# EAGLE board Qwiic RFID - IDXXLA-Panel (EAGLE 9.1.0), part 1 of 2
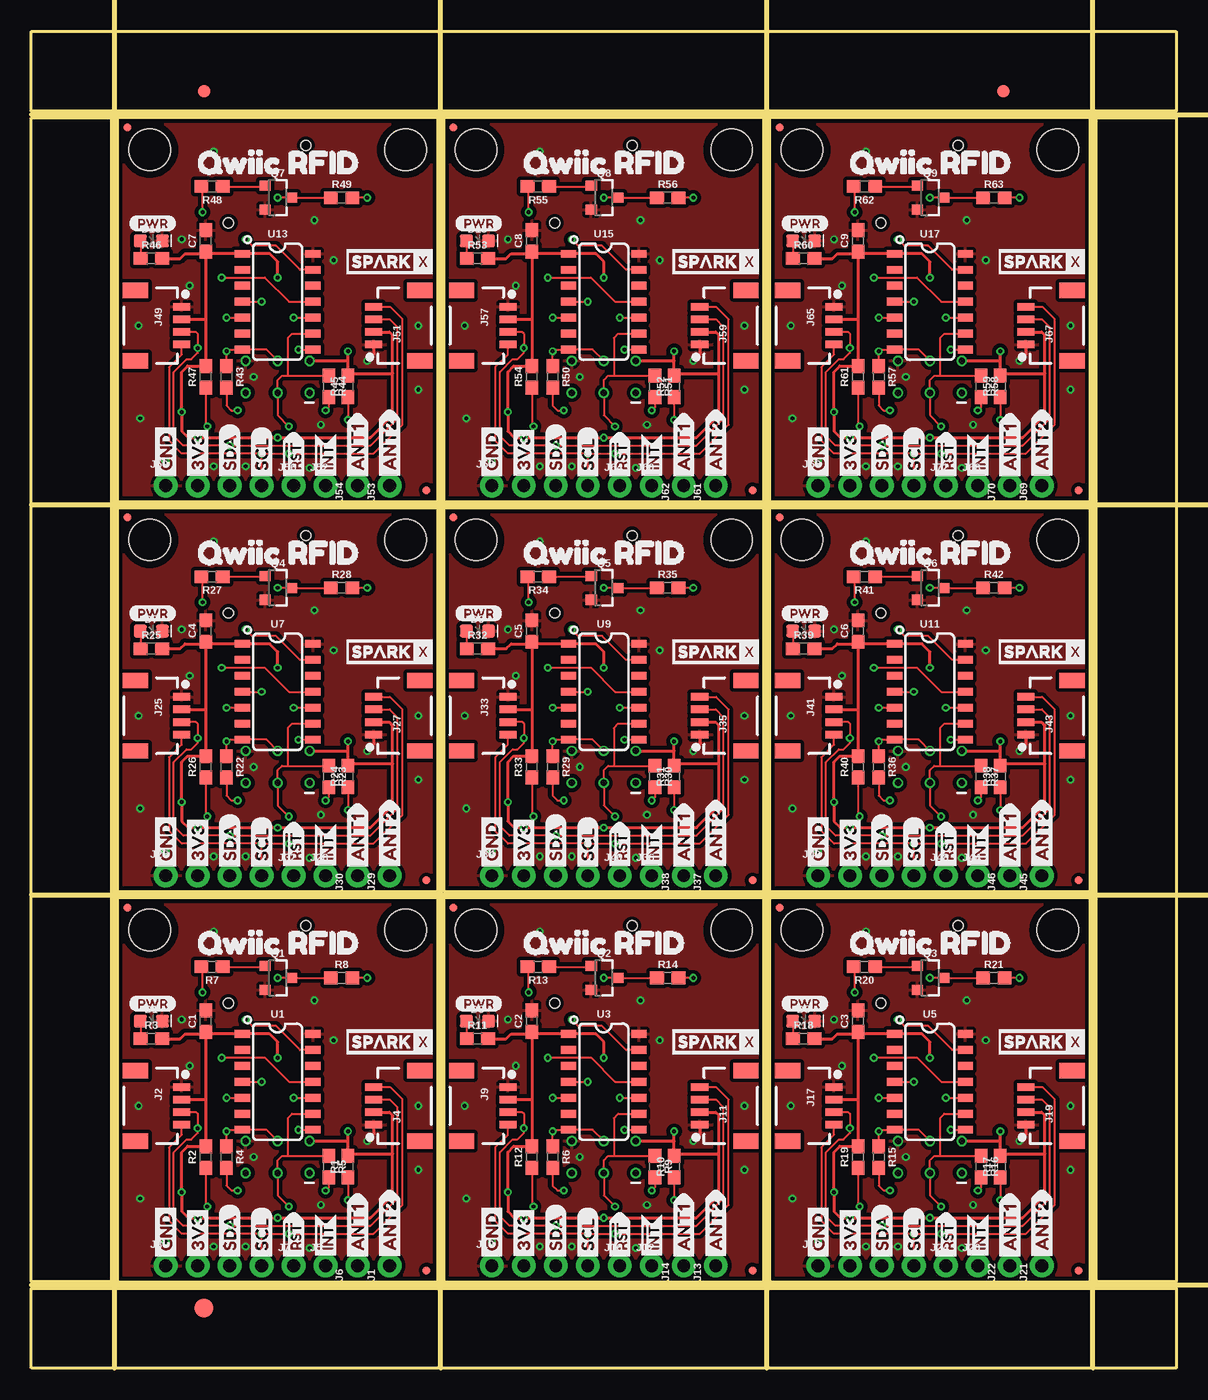
[diagram p0: board, top side]
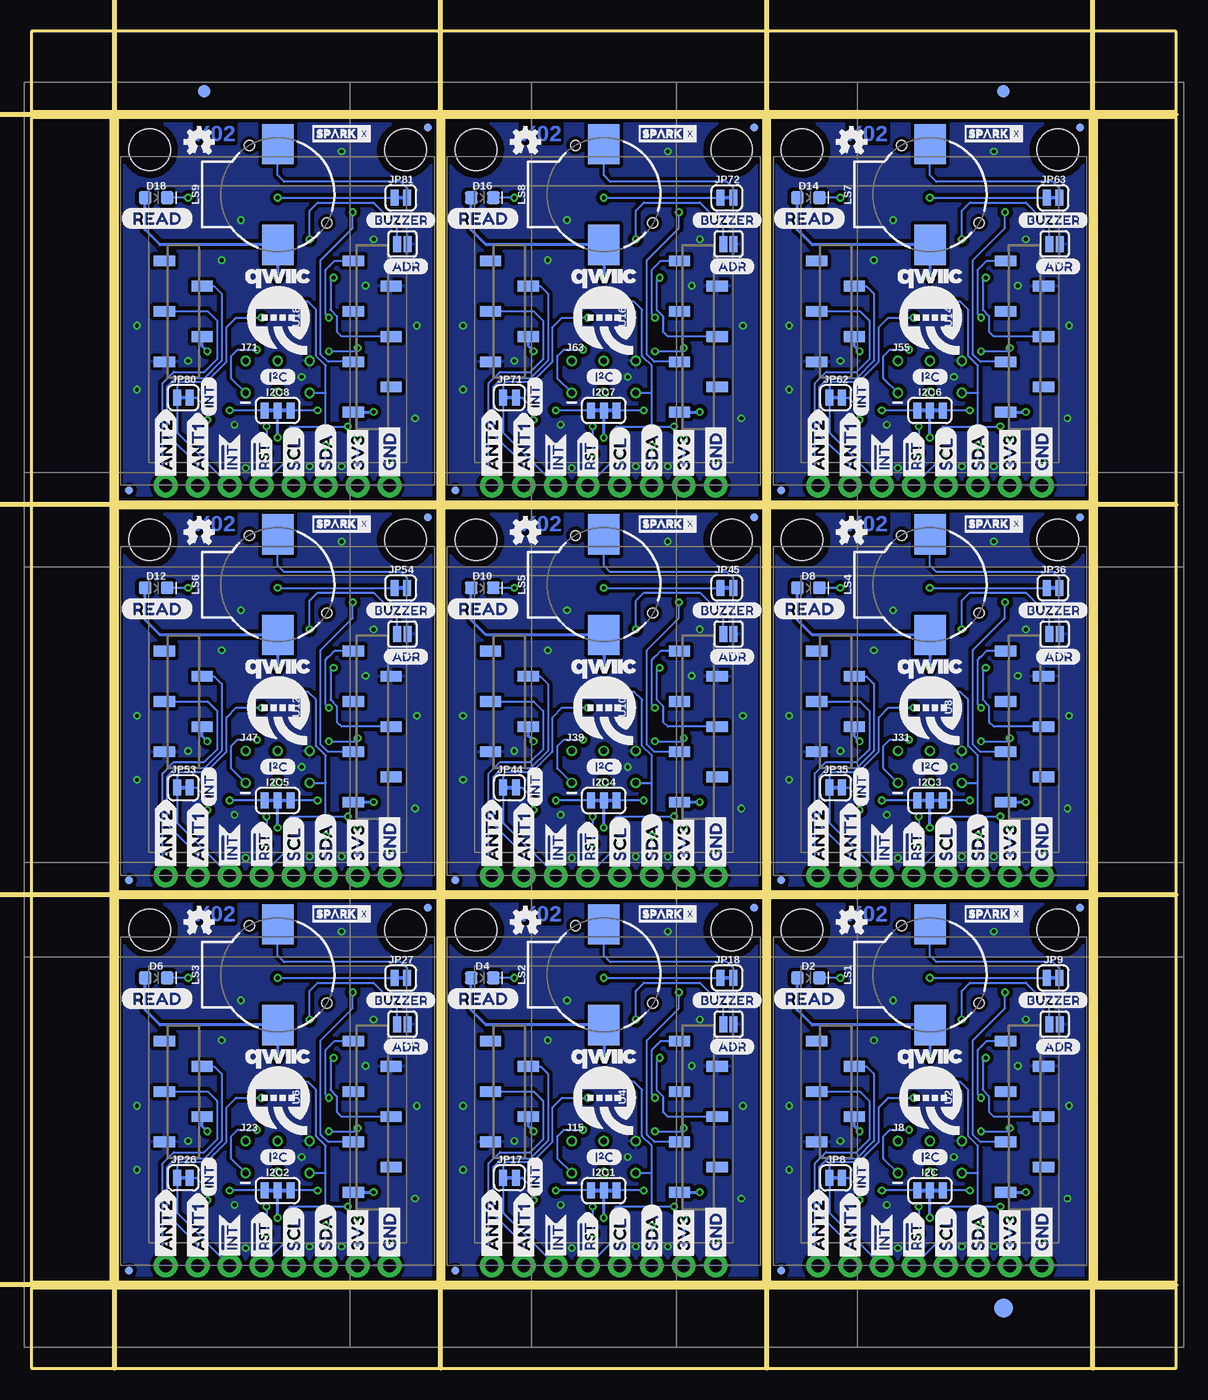
[diagram p1: board, bottom side, seen from below]

Size 90.93 x 106.17 mm. Coordinates in mm from the lower left corner, seen from the top.
Outline: 6.86,6.86 6.86,37.34 32.26,37.34 32.26,6.86 6.86,6.86
Outline: 32.77,6.86 32.77,37.34 58.17,37.34 58.17,6.86 32.77,6.86
Outline: 58.67,6.86 58.67,37.34 84.07,37.34 84.07,6.86 58.67,6.86
Outline: 6.86,37.85 6.86,68.33 32.26,68.33 32.26,37.85 6.86,37.85
Outline: 32.77,37.85 32.77,68.33 58.17,68.33 58.17,37.85 32.77,37.85
Outline: 58.67,37.85 58.67,68.33 84.07,68.33 84.07,37.85 58.67,37.85
Outline: 6.86,68.83 6.86,99.31 32.26,99.31 32.26,68.83 6.86,68.83
Outline: 32.77,68.83 32.77,99.31 58.17,99.31 58.17,68.83 32.77,68.83
Outline: 58.67,68.83 58.67,99.31 84.07,99.31 84.07,68.83 58.67,68.83
Outline: 0,6.35 90.93,6.35 90.93,0 0,0 0,6.35
Outline: 84.58,99.31 90.93,99.31 90.93,6.86 84.58,6.86 84.58,99.31
Outline: 0,106.17 90.93,106.17 90.93,99.82 0,99.82 0,106.17
Outline: 0,99.31 6.35,99.31 6.35,6.86 0,6.86 0,99.31
Copper layers (1*16): Top 0.035mm / dielectric 1.5mm / Bottom 0.035mm
Design rules "SparkFun-2-layer-PCBWay-LIMIT": minimum track width 6mil, minimum drill 0.3mm, track to track 6mil, track to pad 6mil, pad to pad 6mil, via to via 6mil, smd to smd 6mil, copper to edge 6mil, drill to drill 6mil, minimum pad ring 6mil, minimum via ring 6mil, stop-mask expansion 4mil, vias tented up to drill 25mil, thermal gap 10mil
Milling: 8 lines

## Footprints (pad centres in the part's own frame; a part is rotated, then mirrored left to right if it is on the bottom)
0603 = smd 1.1 x 1: 1 -0.85,0; 2 0.85,0
LED-0603 = smd 1 x 1: A -0.877,0; C 0.877,0
FIDUCIAL-1X2 = smd 1 x 1: 1 0,0
FIDUCIAL-1.5X3 = smd 1.5 x 1.5: 1 0,0
SMT-JUMPER_3_2-NC_TRACE_SILK = smd 0.635 x 1.27: 1 -1.016,0; 2 0,0; 3 1.016,0
1X01_NO_SILK = drill 1.016 pad 1.88: 1 0,0
1X04_1MM_RA = smd 0.6 x 1.35: 1 -1.5,0; 2 -0.5,0; 3 0.5,0; 4 1.5,0 | smd 1.2 x 2: NC1 2.8,-3.675; NC2 -2.8,-3.675
1X04_NO_SILK = drill 1.016 pad 1.88: 1 0,0; 2 2.54,0; 3 5.08,0; 4 7.62,0
2X3_TEST_POINTS = drill 0.508: 1 -2.54,-1.27; 2 -2.54,1.27; 3 0,-1.27; 4 0,1.27; 5 2.54,-1.27; 6 2.54,1.27
MICRO-FIDUCIAL = smd 0.635 x 0.635: 1 0,0
STAND-OFF = hole 3.302: 0,0
SMT-JUMPER_2_NO_SILK = smd 0.635 x 1.27: 1 -0.406,0; 2 0.406,0
SMT-JUMPER_2_NC_TRACE_SILK = smd 0.635 x 1.27: 1 -0.508,0; 2 0.508,0
BUZZER-CCV = smd 3.2 x 2.5: + 4,0; - -4,0 | hole 0.8: -3.9,-2.25; 2.25,3.9
SOT23-3 = smd 0.8 x 0.9: 1 -0.95,-1; 2 0.95,-1; 3 0,1.1
SO14 = smd 0.6 x 1.2: 1 -3.175,-2.8; 2 -1.905,-2.8; 3 -0.635,-2.8; 4 0.635,-2.8; 5 1.905,-2.8; 6 3.175,-2.8; 7 4.445,-2.8; 8 4.445,2.8; 9 3.175,2.8; 10 1.905,2.8; 11 0.635,2.8; 12 -0.635,2.8; 13 -1.905,2.8; 14 -3.175,2.8
ID-12_SMD = smd 0.85 x 1.7: 1 2.993,-8.998; 2 0.993,-5.998; 3 -1.007,-8.998; 4 -3.007,-5.998; 5 -5.007,-8.998; 6 -5.007,6.013; 7 -3.007,9.013; 8 -1.007,6.013; 9 0.993,9.013; 10 2.993,6.013; 11 6.993,6.013; NC 4.993,9.013

## Placement (x,y rotation side)
C1  0.1uF  [0603]  13.84,27.56 90 top
C2  0.1uF  [0603]  39.75,27.56 90 top
C3  0.1uF  [0603]  65.66,27.56 90 top
C4  0.1uF  [0603]  13.84,58.55 90 top
C5  0.1uF  [0603]  39.75,58.55 90 top
C6  0.1uF  [0603]  65.66,58.55 90 top
C7  0.1uF  [0603]  13.84,89.54 90 top
C8  0.1uF  [0603]  39.75,89.54 90 top
C9  0.1uF  [0603]  65.66,89.54 90 top
D1  RED  [LED-0603]  9.52,27.56 0 top
D2  BLUE  [LED-0603]  29.21,30.99 0 bottom
D3  RED  [LED-0603]  35.43,27.56 0 top
D4  BLUE  [LED-0603]  55.12,30.99 0 bottom
D5  RED  [LED-0603]  61.34,27.56 0 top
D6  BLUE  [LED-0603]  81.03,30.99 0 bottom
D7  RED  [LED-0603]  9.52,58.55 0 top
D8  BLUE  [LED-0603]  29.21,61.98 0 bottom
D9  RED  [LED-0603]  35.43,58.55 0 top
D10  BLUE  [LED-0603]  55.12,61.98 0 bottom
D11  RED  [LED-0603]  61.34,58.55 0 top
D12  BLUE  [LED-0603]  81.03,61.98 0 bottom
D13  RED  [LED-0603]  9.52,89.54 0 top
D14  BLUE  [LED-0603]  29.21,92.96 0 bottom
D15  RED  [LED-0603]  35.43,89.54 0 top
D16  BLUE  [LED-0603]  55.12,92.96 0 bottom
D17  RED  [LED-0603]  61.34,89.54 0 top
D18  BLUE  [LED-0603]  81.03,92.96 0 bottom
E$1  [FIDUCIAL-1X2]  13.72,101.41 0 top
E$2  [FIDUCIAL-1X2]  13.72,101.41 0 bottom
E$3  [FIDUCIAL-1X2]  77.22,101.41 0 top
E$4  [FIDUCIAL-1X2]  77.22,101.41 0 bottom
E$5  [FIDUCIAL-1.5X3]  13.72,4.76 0 top
E$6  [FIDUCIAL-1.5X3]  13.72,4.76 0 bottom
I2C  [SMT-JUMPER_3_2-NC_TRACE_SILK]  19.56,14.1 0 bottom
I2C1  [SMT-JUMPER_3_2-NC_TRACE_SILK]  45.47,14.1 0 bottom
I2C2  [SMT-JUMPER_3_2-NC_TRACE_SILK]  71.37,14.1 0 bottom
I2C3  [SMT-JUMPER_3_2-NC_TRACE_SILK]  19.56,45.08 0 bottom
I2C4  [SMT-JUMPER_3_2-NC_TRACE_SILK]  45.47,45.08 0 bottom
I2C5  [SMT-JUMPER_3_2-NC_TRACE_SILK]  71.37,45.08 0 bottom
I2C6  [SMT-JUMPER_3_2-NC_TRACE_SILK]  19.56,76.07 0 bottom
I2C7  [SMT-JUMPER_3_2-NC_TRACE_SILK]  45.47,76.07 0 bottom
I2C8  [SMT-JUMPER_3_2-NC_TRACE_SILK]  71.37,76.07 0 bottom
J1  [1X01_NO_SILK]  28.45,8.13 90 top
J2  SMD  [1X04_1MM_RA]  11.94,20.83 270 top
J3  PTH  [1X04_NO_SILK]  10.67,8.13 0 top
J4  SMD  [1X04_1MM_RA]  27.18,20.83 90 top
J5  [1X01_NO_SILK]  23.37,8.13 0 top
J6  [1X01_NO_SILK]  25.91,8.13 90 top
J7  [1X01_NO_SILK]  20.83,8.13 0 top
J8  AVR_SPI_PROG_3X2TESTPOINTS  [2X3_TEST_POINTS]  19.56,16.76 0 bottom
J9  SMD  [1X04_1MM_RA]  37.85,20.83 270 top
J10  PTH  [1X04_NO_SILK]  36.58,8.13 0 top
J11  SMD  [1X04_1MM_RA]  53.09,20.83 90 top
J12  [1X01_NO_SILK]  49.28,8.13 0 top
J13  [1X01_NO_SILK]  54.36,8.13 90 top
J14  [1X01_NO_SILK]  51.82,8.13 90 top
J15  AVR_SPI_PROG_3X2TESTPOINTS  [2X3_TEST_POINTS]  45.47,16.76 0 bottom
J16  [1X01_NO_SILK]  46.74,8.13 0 top
J17  SMD  [1X04_1MM_RA]  63.75,20.83 270 top
J18  PTH  [1X04_NO_SILK]  62.48,8.13 0 top
J19  SMD  [1X04_1MM_RA]  78.99,20.83 90 top
J20  [1X01_NO_SILK]  75.18,8.13 0 top
J21  [1X01_NO_SILK]  80.26,8.13 90 top
J22  [1X01_NO_SILK]  77.72,8.13 90 top
J23  AVR_SPI_PROG_3X2TESTPOINTS  [2X3_TEST_POINTS]  71.37,16.76 0 bottom
J24  [1X01_NO_SILK]  72.64,8.13 0 top
J25  SMD  [1X04_1MM_RA]  11.94,51.82 270 top
J26  PTH  [1X04_NO_SILK]  10.67,39.12 0 top
J27  SMD  [1X04_1MM_RA]  27.18,51.82 90 top
J28  [1X01_NO_SILK]  23.37,39.12 0 top
J29  [1X01_NO_SILK]  28.45,39.12 90 top
J30  [1X01_NO_SILK]  25.91,39.12 90 top
J31  AVR_SPI_PROG_3X2TESTPOINTS  [2X3_TEST_POINTS]  19.56,47.75 0 bottom
J32  [1X01_NO_SILK]  20.83,39.12 0 top
J33  SMD  [1X04_1MM_RA]  37.85,51.82 270 top
J34  PTH  [1X04_NO_SILK]  36.58,39.12 0 top
J35  SMD  [1X04_1MM_RA]  53.09,51.82 90 top
J36  [1X01_NO_SILK]  49.28,39.12 0 top
J37  [1X01_NO_SILK]  54.36,39.12 90 top
J38  [1X01_NO_SILK]  51.82,39.12 90 top
J39  AVR_SPI_PROG_3X2TESTPOINTS  [2X3_TEST_POINTS]  45.47,47.75 0 bottom
J40  [1X01_NO_SILK]  46.74,39.12 0 top
J41  SMD  [1X04_1MM_RA]  63.75,51.82 270 top
J42  PTH  [1X04_NO_SILK]  62.48,39.12 0 top
J43  SMD  [1X04_1MM_RA]  78.99,51.82 90 top
J44  [1X01_NO_SILK]  75.18,39.12 0 top
J45  [1X01_NO_SILK]  80.26,39.12 90 top
J46  [1X01_NO_SILK]  77.72,39.12 90 top
J47  AVR_SPI_PROG_3X2TESTPOINTS  [2X3_TEST_POINTS]  71.37,47.75 0 bottom
J48  [1X01_NO_SILK]  72.64,39.12 0 top
J49  SMD  [1X04_1MM_RA]  11.94,82.8 270 top
J50  PTH  [1X04_NO_SILK]  10.67,70.1 0 top
J51  SMD  [1X04_1MM_RA]  27.18,82.8 90 top
J52  [1X01_NO_SILK]  23.37,70.1 0 top
J53  [1X01_NO_SILK]  28.45,70.1 90 top
J54  [1X01_NO_SILK]  25.91,70.1 90 top
J55  AVR_SPI_PROG_3X2TESTPOINTS  [2X3_TEST_POINTS]  19.56,78.74 0 bottom
J56  [1X01_NO_SILK]  20.83,70.1 0 top
J57  SMD  [1X04_1MM_RA]  37.85,82.8 270 top
J58  PTH  [1X04_NO_SILK]  36.58,70.1 0 top
J59  SMD  [1X04_1MM_RA]  53.09,82.8 90 top
J60  [1X01_NO_SILK]  49.28,70.1 0 top
J61  [1X01_NO_SILK]  54.36,70.1 90 top
J62  [1X01_NO_SILK]  51.82,70.1 90 top
J63  AVR_SPI_PROG_3X2TESTPOINTS  [2X3_TEST_POINTS]  45.47,78.74 0 bottom
J64  [1X01_NO_SILK]  46.74,70.1 0 top
J65  SMD  [1X04_1MM_RA]  63.75,82.8 270 top
J66  PTH  [1X04_NO_SILK]  62.48,70.1 0 top
J67  SMD  [1X04_1MM_RA]  78.99,82.8 90 top
J68  [1X01_NO_SILK]  75.18,70.1 0 top
J69  [1X01_NO_SILK]  80.26,70.1 90 top
J70  [1X01_NO_SILK]  77.72,70.1 90 top
J71  AVR_SPI_PROG_3X2TESTPOINTS  [2X3_TEST_POINTS]  71.37,78.74 0 bottom
J72  [1X01_NO_SILK]  72.64,70.1 0 top
JP1  FIDUCIALUFIDUCIAL  [MICRO-FIDUCIAL]  7.62,36.58 0 bottom
JP2  FIDUCIALUFIDUCIAL  [MICRO-FIDUCIAL]  31.37,7.75 0 top
JP3  STAND-OFF  [STAND-OFF]  9.4,34.8 0 top
JP4  STAND-OFF  [STAND-OFF]  29.72,34.8 0 top
JP5  FIDUCIALUFIDUCIAL  [MICRO-FIDUCIAL]  31.37,7.75 0 bottom
JP6  FIDUCIALUFIDUCIAL  [MICRO-FIDUCIAL]  7.62,36.58 0 top
JP7  ADR  [SMT-JUMPER_2_NO_SILK]  9.65,27.3 180 bottom
JP8  INT  [SMT-JUMPER_2_NC_TRACE_SILK]  27.05,15.11 0 bottom
JP9  BUZZ  [SMT-JUMPER_2_NC_TRACE_SILK]  9.78,30.99 0 bottom
JP10  STAND-OFF  [STAND-OFF]  35.31,34.8 0 top
JP11  STAND-OFF  [STAND-OFF]  55.63,34.8 0 top
JP12  FIDUCIALUFIDUCIAL  [MICRO-FIDUCIAL]  57.28,7.75 0 top
JP13  FIDUCIALUFIDUCIAL  [MICRO-FIDUCIAL]  33.53,36.58 0 top
JP14  FIDUCIALUFIDUCIAL  [MICRO-FIDUCIAL]  33.53,36.58 0 bottom
JP15  FIDUCIALUFIDUCIAL  [MICRO-FIDUCIAL]  57.28,7.75 0 bottom
JP16  ADR  [SMT-JUMPER_2_NO_SILK]  35.56,27.3 180 bottom
JP17  INT  [SMT-JUMPER_2_NC_TRACE_SILK]  52.96,15.11 0 bottom
JP18  BUZZ  [SMT-JUMPER_2_NC_TRACE_SILK]  35.69,30.99 0 bottom
JP19  STAND-OFF  [STAND-OFF]  61.21,34.8 0 top
JP20  STAND-OFF  [STAND-OFF]  81.53,34.8 0 top
JP21  FIDUCIALUFIDUCIAL  [MICRO-FIDUCIAL]  83.19,7.75 0 top
JP22  FIDUCIALUFIDUCIAL  [MICRO-FIDUCIAL]  59.44,36.58 0 top
JP23  FIDUCIALUFIDUCIAL  [MICRO-FIDUCIAL]  59.44,36.58 0 bottom
JP24  FIDUCIALUFIDUCIAL  [MICRO-FIDUCIAL]  83.19,7.75 0 bottom
JP25  ADR  [SMT-JUMPER_2_NO_SILK]  61.47,27.3 180 bottom
JP26  INT  [SMT-JUMPER_2_NC_TRACE_SILK]  78.87,15.11 0 bottom
JP27  BUZZ  [SMT-JUMPER_2_NC_TRACE_SILK]  61.59,30.99 0 bottom
JP28  STAND-OFF  [STAND-OFF]  9.4,65.79 0 top
JP29  STAND-OFF  [STAND-OFF]  29.72,65.79 0 top
JP30  FIDUCIALUFIDUCIAL  [MICRO-FIDUCIAL]  31.37,38.73 0 top
JP31  FIDUCIALUFIDUCIAL  [MICRO-FIDUCIAL]  7.62,67.56 0 top
JP32  FIDUCIALUFIDUCIAL  [MICRO-FIDUCIAL]  7.62,67.56 0 bottom
JP33  FIDUCIALUFIDUCIAL  [MICRO-FIDUCIAL]  31.37,38.73 0 bottom
JP34  ADR  [SMT-JUMPER_2_NO_SILK]  9.65,58.29 180 bottom
JP35  INT  [SMT-JUMPER_2_NC_TRACE_SILK]  27.05,46.1 0 bottom
JP36  BUZZ  [SMT-JUMPER_2_NC_TRACE_SILK]  9.78,61.98 0 bottom
JP37  STAND-OFF  [STAND-OFF]  35.31,65.79 0 top
JP38  STAND-OFF  [STAND-OFF]  55.63,65.79 0 top
JP39  FIDUCIALUFIDUCIAL  [MICRO-FIDUCIAL]  57.28,38.73 0 top
JP40  FIDUCIALUFIDUCIAL  [MICRO-FIDUCIAL]  33.53,67.56 0 top
JP41  FIDUCIALUFIDUCIAL  [MICRO-FIDUCIAL]  33.53,67.56 0 bottom
JP42  FIDUCIALUFIDUCIAL  [MICRO-FIDUCIAL]  57.28,38.73 0 bottom
JP43  ADR  [SMT-JUMPER_2_NO_SILK]  35.56,58.29 180 bottom
JP44  INT  [SMT-JUMPER_2_NC_TRACE_SILK]  52.96,46.1 0 bottom
JP45  BUZZ  [SMT-JUMPER_2_NC_TRACE_SILK]  35.69,61.98 0 bottom
JP46  STAND-OFF  [STAND-OFF]  61.21,65.79 0 top
JP47  STAND-OFF  [STAND-OFF]  81.53,65.79 0 top
JP48  FIDUCIALUFIDUCIAL  [MICRO-FIDUCIAL]  83.19,38.73 0 top
JP49  FIDUCIALUFIDUCIAL  [MICRO-FIDUCIAL]  59.44,67.56 0 top
JP50  FIDUCIALUFIDUCIAL  [MICRO-FIDUCIAL]  59.44,67.56 0 bottom
JP51  FIDUCIALUFIDUCIAL  [MICRO-FIDUCIAL]  83.19,38.73 0 bottom
JP52  ADR  [SMT-JUMPER_2_NO_SILK]  61.47,58.29 180 bottom
JP53  INT  [SMT-JUMPER_2_NC_TRACE_SILK]  78.87,46.1 0 bottom
JP54  BUZZ  [SMT-JUMPER_2_NC_TRACE_SILK]  61.59,61.98 0 bottom
JP55  STAND-OFF  [STAND-OFF]  9.4,96.77 0 top
JP56  STAND-OFF  [STAND-OFF]  29.72,96.77 0 top
JP57  FIDUCIALUFIDUCIAL  [MICRO-FIDUCIAL]  31.37,69.72 0 top
JP58  FIDUCIALUFIDUCIAL  [MICRO-FIDUCIAL]  7.62,98.55 0 top
JP59  FIDUCIALUFIDUCIAL  [MICRO-FIDUCIAL]  7.62,98.55 0 bottom
JP60  FIDUCIALUFIDUCIAL  [MICRO-FIDUCIAL]  31.37,69.72 0 bottom
JP61  ADR  [SMT-JUMPER_2_NO_SILK]  9.65,89.28 180 bottom
JP62  INT  [SMT-JUMPER_2_NC_TRACE_SILK]  27.05,77.09 0 bottom
JP63  BUZZ  [SMT-JUMPER_2_NC_TRACE_SILK]  9.78,92.96 0 bottom
JP64  STAND-OFF  [STAND-OFF]  35.31,96.77 0 top
JP65  STAND-OFF  [STAND-OFF]  55.63,96.77 0 top
JP66  FIDUCIALUFIDUCIAL  [MICRO-FIDUCIAL]  57.28,69.72 0 top
JP67  FIDUCIALUFIDUCIAL  [MICRO-FIDUCIAL]  33.53,98.55 0 top
JP68  FIDUCIALUFIDUCIAL  [MICRO-FIDUCIAL]  33.53,98.55 0 bottom
JP69  FIDUCIALUFIDUCIAL  [MICRO-FIDUCIAL]  57.28,69.72 0 bottom
JP70  ADR  [SMT-JUMPER_2_NO_SILK]  35.56,89.28 180 bottom
JP71  INT  [SMT-JUMPER_2_NC_TRACE_SILK]  52.96,77.09 0 bottom
JP72  BUZZ  [SMT-JUMPER_2_NC_TRACE_SILK]  35.69,92.96 0 bottom
JP73  STAND-OFF  [STAND-OFF]  61.21,96.77 0 top
JP74  STAND-OFF  [STAND-OFF]  81.53,96.77 0 top
JP75  FIDUCIALUFIDUCIAL  [MICRO-FIDUCIAL]  83.19,69.72 0 top
JP76  FIDUCIALUFIDUCIAL  [MICRO-FIDUCIAL]  59.44,98.55 0 top
JP77  FIDUCIALUFIDUCIAL  [MICRO-FIDUCIAL]  59.44,98.55 0 bottom
JP78  FIDUCIALUFIDUCIAL  [MICRO-FIDUCIAL]  83.19,69.72 0 bottom
JP79  ADR  [SMT-JUMPER_2_NO_SILK]  61.47,89.28 180 bottom
JP80  INT  [SMT-JUMPER_2_NC_TRACE_SILK]  78.87,77.09 0 bottom
JP81  BUZZ  [SMT-JUMPER_2_NC_TRACE_SILK]  61.59,92.96 0 bottom
LOGO1  OSHW-LOGOMINI  [OSHW-LOGO-MINI]  25.78,35.43 0 bottom
LOGO2  OSHW-LOGOMINI  [OSHW-LOGO-MINI]  51.69,35.43 0 bottom
LOGO3  OSHW-LOGOMINI  [OSHW-LOGO-MINI]  77.6,35.43 0 bottom
LOGO4  OSHW-LOGOMINI  [OSHW-LOGO-MINI]  25.78,66.42 0 bottom
LOGO5  OSHW-LOGOMINI  [OSHW-LOGO-MINI]  51.69,66.42 0 bottom
LOGO6  OSHW-LOGOMINI  [OSHW-LOGO-MINI]  77.6,66.42 0 bottom
LOGO7  OSHW-LOGOMINI  [OSHW-LOGO-MINI]  25.78,97.41 0 bottom
LOGO8  OSHW-LOGOMINI  [OSHW-LOGO-MINI]  51.69,97.41 0 bottom
LOGO9  OSHW-LOGOMINI  [OSHW-LOGO-MINI]  77.6,97.41 0 bottom
LS1  BUZZER-SMD  [BUZZER-CCV]  19.56,31.24 270 bottom
LS2  BUZZER-SMD  [BUZZER-CCV]  45.47,31.24 270 bottom
LS3  BUZZER-SMD  [BUZZER-CCV]  71.37,31.24 270 bottom
LS4  BUZZER-SMD  [BUZZER-CCV]  19.56,62.23 270 bottom
LS5  BUZZER-SMD  [BUZZER-CCV]  45.47,62.23 270 bottom
LS6  BUZZER-SMD  [BUZZER-CCV]  71.37,62.23 270 bottom
LS7  BUZZER-SMD  [BUZZER-CCV]  19.56,93.22 270 bottom
LS8  BUZZER-SMD  [BUZZER-CCV]  45.47,93.22 270 bottom
LS9  BUZZER-SMD  [BUZZER-CCV]  71.37,93.22 270 bottom
Q1  600mA/40V  [SOT23-3]  19.56,30.99 270 top
Q2  600mA/40V  [SOT23-3]  45.47,30.99 270 top
Q3  600mA/40V  [SOT23-3]  71.37,30.99 270 top
Q4  600mA/40V  [SOT23-3]  19.56,61.98 270 top
Q5  600mA/40V  [SOT23-3]  45.47,61.98 270 top
Q6  600mA/40V  [SOT23-3]  71.37,61.98 270 top
Q7  600mA/40V  [SOT23-3]  19.56,92.96 270 top
Q8  600mA/40V  [SOT23-3]  45.47,92.96 270 top
Q9  600mA/40V  [SOT23-3]  71.37,92.96 270 top
R1  10k  [0603]  25.15,16 90 top
R2  10k  [0603]  13.84,16.76 90 top
R3  1k  [0603]  9.52,26.16 0 top
R4  2.2k  [0603]  15.49,16.76 270 top
R5  2.2k  [0603]  23.62,16 270 top
R6  2.2k  [0603]  41.4,16.76 270 top
R7  1k  [0603]  14.35,31.88 180 top
R8  1k  [0603]  24.64,30.99 0 top
R9  2.2k  [0603]  49.53,16 270 top
R10  10k  [0603]  51.05,16 90 top
R11  1k  [0603]  35.43,26.16 0 top
R12  10k  [0603]  39.75,16.76 90 top
R13  1k  [0603]  40.26,31.88 180 top
R14  1k  [0603]  50.55,30.99 0 top
R15  2.2k  [0603]  67.31,16.76 270 top
R16  2.2k  [0603]  75.44,16 270 top
R17  10k  [0603]  76.96,16 90 top
R18  1k  [0603]  61.34,26.16 0 top
R19  10k  [0603]  65.66,16.76 90 top
R20  1k  [0603]  66.17,31.88 180 top
R21  1k  [0603]  76.45,30.99 0 top
R22  2.2k  [0603]  15.49,47.75 270 top
R23  2.2k  [0603]  23.62,46.99 270 top
R24  10k  [0603]  25.15,46.99 90 top
R25  1k  [0603]  9.52,57.15 0 top
R26  10k  [0603]  13.84,47.75 90 top
R27  1k  [0603]  14.35,62.86 180 top
R28  1k  [0603]  24.64,61.98 0 top
R29  2.2k  [0603]  41.4,47.75 270 top
R30  2.2k  [0603]  49.53,46.99 270 top
R31  10k  [0603]  51.05,46.99 90 top
R32  1k  [0603]  35.43,57.15 0 top
R33  10k  [0603]  39.75,47.75 90 top
R34  1k  [0603]  40.26,62.86 180 top
R35  1k  [0603]  50.55,61.98 0 top
R36  2.2k  [0603]  67.31,47.75 270 top
R37  2.2k  [0603]  75.44,46.99 270 top
R38  10k  [0603]  76.96,46.99 90 top
R39  1k  [0603]  61.34,57.15 0 top
R40  10k  [0603]  65.66,47.75 90 top
R41  1k  [0603]  66.17,62.86 180 top
R42  1k  [0603]  76.45,61.98 0 top
R43  2.2k  [0603]  15.49,78.74 270 top
R44  2.2k  [0603]  23.62,77.98 270 top
R45  10k  [0603]  25.15,77.98 90 top
R46  1k  [0603]  9.52,88.14 0 top
R47  10k  [0603]  13.84,78.74 90 top
R48  1k  [0603]  14.35,93.85 180 top
R49  1k  [0603]  24.64,92.96 0 top
R50  2.2k  [0603]  41.4,78.74 270 top
R51  2.2k  [0603]  49.53,77.98 270 top
R52  10k  [0603]  51.05,77.98 90 top
R53  1k  [0603]  35.43,88.14 0 top
R54  10k  [0603]  39.75,78.74 90 top
R55  1k  [0603]  40.26,93.85 180 top
R56  1k  [0603]  50.55,92.96 0 top
R57  2.2k  [0603]  67.31,78.74 270 top
R58  2.2k  [0603]  75.44,77.98 270 top
R59  10k  [0603]  76.96,77.98 90 top
R60  1k  [0603]  61.34,88.14 0 top
R61  10k  [0603]  65.66,78.74 90 top
R62  1k  [0603]  66.17,93.85 180 top
R63  1k  [0603]  76.45,92.96 0 top
U1  ATTINY84-ARDUINO  [SO14]  19.56,23.37 270 top
U2  ID-12/20SMD  [ID-12_SMD]  19.56,20.95 270 bottom
U3  ATTINY84-ARDUINO  [SO14]  45.47,23.37 270 top
U4  ID-12/20SMD  [ID-12_SMD]  45.47,20.95 270 bottom
U5  ATTINY84-ARDUINO  [SO14]  71.37,23.37 270 top
U6  ID-12/20SMD  [ID-12_SMD]  71.37,20.95 270 bottom
U7  ATTINY84-ARDUINO  [SO14]  19.56,54.36 270 top
U8  ID-12/20SMD  [ID-12_SMD]  19.56,51.94 270 bottom
U9  ATTINY84-ARDUINO  [SO14]  45.47,54.36 270 top
U10  ID-12/20SMD  [ID-12_SMD]  45.47,51.94 270 bottom
U11  ATTINY84-ARDUINO  [SO14]  71.37,54.36 270 top
U12  ID-12/20SMD  [ID-12_SMD]  71.37,51.94 270 bottom
U13  ATTINY84-ARDUINO  [SO14]  19.56,85.34 270 top
U14  ID-12/20SMD  [ID-12_SMD]  19.56,82.93 270 bottom
U15  ATTINY84-ARDUINO  [SO14]  45.47,85.34 270 top
U16  ID-12/20SMD  [ID-12_SMD]  45.47,82.93 270 bottom
U17  ATTINY84-ARDUINO  [SO14]  71.37,85.34 270 top
U18  ID-12/20SMD  [ID-12_SMD]  71.37,82.93 270 bottom
U$1  [SPARKX-TINY]  14.48,36.07 0 bottom
U$2  [I_SUPER2_C-()-03]  20.95,16.76 0 bottom
U$3  [ANT20]  28.45,8.38 90 bottom
U$4  SPARKX-LOGO3  [SPARKX-SMALL]  28.45,25.91 0 top
U$5  [RST#-[>]  20.83,8.25 90 top
U$6  [SDA-[)]  15.75,8.38 90 top
U$7  [SCL-[)]  18.29,8.38 90 top
U$8  [QWIIC-LOGO-MEDIUM]  19.56,21.97 0 bottom
U$9  [GND-04]  10.67,8.38 90 top
U$10  [3V3-04]  13.21,8.38 90 top
U$11  [INT#-[<]  23.37,8.25 90 top
U$12  [ADR0]  11.18,25.53 0 bottom
U$13  [INT0]  25.02,13.59 90 bottom
U$14  [PWR-()-03]  7.75,28.96 0 top
U$15  [BUZZER0]  12.57,29.21 0 bottom
U$16  [ANT10]  25.91,8.38 90 top
U$17  [ANT20]  28.45,8.38 90 top
U$18  [READ0]  32,29.34 0 bottom
U$19  [QWIIC_RFID0]  11.56,33.78 0 top
U$20  [ANT10]  25.91,8.38 90 bottom
U$21  [INT#-[<]  23.37,8.25 90 bottom
U$22  [SCL-[)]  18.29,8.38 90 bottom
U$23  [SDA-[)]  15.75,8.38 90 bottom
U$24  [3V3-04]  13.21,8.38 90 bottom
U$25  [GND-04]  10.67,8.38 90 bottom
U$26  [RST#-[>]  20.83,8.25 90 bottom
U$27  [QWIIC-LOGO-MEDIUM]  45.47,21.97 0 bottom
U$28  SPARKX-LOGO3  [SPARKX-SMALL]  54.36,25.91 0 top
U$29  [RST#-[>]  46.74,8.25 90 top
U$30  [SDA-[)]  41.66,8.38 90 top
U$31  [SCL-[)]  44.2,8.38 90 top
U$32  [GND-04]  36.58,8.38 90 top
U$33  [3V3-04]  39.12,8.38 90 top
U$34  [INT#-[<]  49.28,8.25 90 top
U$35  [BUZZER0]  38.48,29.21 0 bottom
U$36  [ANT10]  51.82,8.38 90 top
U$37  [ANT20]  54.36,8.38 90 top
U$38  [READ0]  57.91,29.34 0 bottom
U$39  [QWIIC_RFID0]  37.46,33.78 0 top
U$40  [ANT20]  54.36,8.38 90 bottom
U$41  [ANT10]  51.82,8.38 90 bottom
U$42  [INT#-[<]  49.28,8.25 90 bottom
U$43  [SCL-[)]  44.2,8.38 90 bottom
U$44  [SDA-[)]  41.66,8.38 90 bottom
U$45  [3V3-04]  39.12,8.38 90 bottom
U$46  [GND-04]  36.58,8.38 90 bottom
U$47  [RST#-[>]  46.74,8.25 90 bottom
U$48  [I_SUPER2_C-()-03]  46.86,16.76 0 bottom
U$49  [ADR0]  37.08,25.53 0 bottom
U$50  [INT0]  50.93,13.59 90 bottom
U$51  [PWR-()-03]  33.66,28.96 0 top
U$52  [SPARKX-TINY]  40.39,36.07 0 bottom
U$53  [QWIIC-LOGO-MEDIUM]  71.37,21.97 0 bottom
U$54  SPARKX-LOGO3  [SPARKX-SMALL]  80.26,25.91 0 top
U$55  [RST#-[>]  72.64,8.25 90 top
U$56  [SDA-[)]  67.56,8.38 90 top
U$57  [SCL-[)]  70.1,8.38 90 top
U$58  [GND-04]  62.48,8.38 90 top
U$59  [3V3-04]  65.02,8.38 90 top
U$60  [INT#-[<]  75.18,8.25 90 top
U$61  [BUZZER0]  64.39,29.21 0 bottom
U$62  [ANT10]  77.72,8.38 90 top
U$63  [ANT20]  80.26,8.38 90 top
U$64  [READ0]  83.82,29.34 0 bottom
U$65  [QWIIC_RFID0]  63.37,33.78 0 top
U$66  [ANT20]  80.26,8.38 90 bottom
U$67  [ANT10]  77.72,8.38 90 bottom
U$68  [INT#-[<]  75.18,8.25 90 bottom
U$69  [SCL-[)]  70.1,8.38 90 bottom
U$70  [SDA-[)]  67.56,8.38 90 bottom
U$71  [3V3-04]  65.02,8.38 90 bottom
U$72  [GND-04]  62.48,8.38 90 bottom
U$73  [RST#-[>]  72.64,8.25 90 bottom
U$74  [I_SUPER2_C-()-03]  72.77,16.76 0 bottom
U$75  [ADR0]  62.99,25.53 0 bottom
U$76  [INT0]  76.84,13.59 90 bottom
U$77  [PWR-()-03]  59.56,28.96 0 top
U$78  [SPARKX-TINY]  66.29,36.07 0 bottom
U$79  [QWIIC-LOGO-MEDIUM]  19.56,52.96 0 bottom
U$80  SPARKX-LOGO3  [SPARKX-SMALL]  28.45,56.9 0 top
U$81  [RST#-[>]  20.83,39.24 90 top
U$82  [SDA-[)]  15.75,39.37 90 top
U$83  [SCL-[)]  18.29,39.37 90 top
U$84  [GND-04]  10.67,39.37 90 top
U$85  [3V3-04]  13.21,39.37 90 top
U$86  [INT#-[<]  23.37,39.24 90 top
U$87  [BUZZER0]  12.57,60.2 0 bottom
U$88  [ANT10]  25.91,39.37 90 top
U$89  [ANT20]  28.45,39.37 90 top
U$90  [READ0]  32,60.32 0 bottom
U$91  [QWIIC_RFID0]  11.56,64.77 0 top
U$92  [ANT20]  28.45,39.37 90 bottom
U$93  [ANT10]  25.91,39.37 90 bottom
U$94  [INT#-[<]  23.37,39.24 90 bottom
U$95  [SCL-[)]  18.29,39.37 90 bottom
U$96  [SDA-[)]  15.75,39.37 90 bottom
U$97  [3V3-04]  13.21,39.37 90 bottom
U$98  [GND-04]  10.67,39.37 90 bottom
U$99  [RST#-[>]  20.83,39.24 90 bottom
U$100  [I_SUPER2_C-()-03]  20.95,47.75 0 bottom
U$101  [ADR0]  11.18,56.51 0 bottom
U$102  [INT0]  25.02,44.58 90 bottom
U$103  [PWR-()-03]  7.75,59.94 0 top
U$104  [SPARKX-TINY]  14.48,67.06 0 bottom
U$105  [QWIIC-LOGO-MEDIUM]  45.47,52.96 0 bottom
U$106  SPARKX-LOGO3  [SPARKX-SMALL]  54.36,56.9 0 top
U$107  [RST#-[>]  46.74,39.24 90 top
U$108  [SDA-[)]  41.66,39.37 90 top
U$109  [SCL-[)]  44.2,39.37 90 top
U$110  [GND-04]  36.58,39.37 90 top
U$111  [3V3-04]  39.12,39.37 90 top
U$112  [INT#-[<]  49.28,39.24 90 top
U$113  [BUZZER0]  38.48,60.2 0 bottom
U$114  [ANT10]  51.82,39.37 90 top
U$115  [ANT20]  54.36,39.37 90 top
U$116  [READ0]  57.91,60.32 0 bottom
U$117  [QWIIC_RFID0]  37.46,64.77 0 top
U$118  [ANT20]  54.36,39.37 90 bottom
U$119  [ANT10]  51.82,39.37 90 bottom
U$120  [INT#-[<]  49.28,39.24 90 bottom
U$121  [SCL-[)]  44.2,39.37 90 bottom
U$122  [SDA-[)]  41.66,39.37 90 bottom
U$123  [3V3-04]  39.12,39.37 90 bottom
U$124  [GND-04]  36.58,39.37 90 bottom
U$125  [RST#-[>]  46.74,39.24 90 bottom
U$126  [I_SUPER2_C-()-03]  46.86,47.75 0 bottom
U$127  [ADR0]  37.08,56.51 0 bottom
U$128  [INT0]  50.93,44.58 90 bottom
U$129  [PWR-()-03]  33.66,59.94 0 top
U$130  [SPARKX-TINY]  40.39,67.06 0 bottom
U$131  [QWIIC-LOGO-MEDIUM]  71.37,52.96 0 bottom
U$132  SPARKX-LOGO3  [SPARKX-SMALL]  80.26,56.9 0 top
U$133  [RST#-[>]  72.64,39.24 90 top
U$134  [SDA-[)]  67.56,39.37 90 top
U$135  [SCL-[)]  70.1,39.37 90 top
U$136  [GND-04]  62.48,39.37 90 top
U$137  [3V3-04]  65.02,39.37 90 top
U$138  [INT#-[<]  75.18,39.24 90 top
U$139  [BUZZER0]  64.39,60.2 0 bottom
U$140  [ANT10]  77.72,39.37 90 top
U$141  [ANT20]  80.26,39.37 90 top
U$142  [READ0]  83.82,60.32 0 bottom
U$143  [QWIIC_RFID0]  63.37,64.77 0 top
U$144  [ANT20]  80.26,39.37 90 bottom
U$145  [ANT10]  77.72,39.37 90 bottom
U$146  [INT#-[<]  75.18,39.24 90 bottom
U$147  [SCL-[)]  70.1,39.37 90 bottom
U$148  [SDA-[)]  67.56,39.37 90 bottom
U$149  [3V3-04]  65.02,39.37 90 bottom
U$150  [GND-04]  62.48,39.37 90 bottom
U$151  [RST#-[>]  72.64,39.24 90 bottom
U$152  [I_SUPER2_C-()-03]  72.77,47.75 0 bottom
U$153  [ADR0]  62.99,56.51 0 bottom
U$154  [INT0]  76.84,44.58 90 bottom
U$155  [PWR-()-03]  59.56,59.94 0 top
U$156  [SPARKX-TINY]  66.29,67.06 0 bottom
U$157  [QWIIC-LOGO-MEDIUM]  19.56,83.95 0 bottom
U$158  SPARKX-LOGO3  [SPARKX-SMALL]  28.45,87.88 0 top
U$159  [RST#-[>]  20.83,70.23 90 top
U$160  [SDA-[)]  15.75,70.36 90 top
U$161  [SCL-[)]  18.29,70.36 90 top
U$162  [GND-04]  10.67,70.36 90 top
U$163  [3V3-04]  13.21,70.36 90 top
U$164  [INT#-[<]  23.37,70.23 90 top
U$165  [BUZZER0]  12.57,91.19 0 bottom
U$166  [ANT10]  25.91,70.36 90 top
U$167  [ANT20]  28.45,70.36 90 top
U$168  [READ0]  32,91.31 0 bottom
U$169  [QWIIC_RFID0]  11.56,95.76 0 top
U$170  [ANT20]  28.45,70.36 90 bottom
U$171  [ANT10]  25.91,70.36 90 bottom
U$172  [INT#-[<]  23.37,70.23 90 bottom
U$173  [SCL-[)]  18.29,70.36 90 bottom
U$174  [SDA-[)]  15.75,70.36 90 bottom
U$175  [3V3-04]  13.21,70.36 90 bottom
U$176  [GND-04]  10.67,70.36 90 bottom
U$177  [RST#-[>]  20.83,70.23 90 bottom
U$178  [I_SUPER2_C-()-03]  20.95,78.74 0 bottom
U$179  [ADR0]  11.18,87.5 0 bottom
U$180  [INT0]  25.02,75.56 90 bottom
U$181  [PWR-()-03]  7.75,90.93 0 top
U$182  [SPARKX-TINY]  14.48,98.04 0 bottom
U$183  [QWIIC-LOGO-MEDIUM]  45.47,83.95 0 bottom
U$184  SPARKX-LOGO3  [SPARKX-SMALL]  54.36,87.88 0 top
U$185  [RST#-[>]  46.74,70.23 90 top
U$186  [SDA-[)]  41.66,70.36 90 top
U$187  [SCL-[)]  44.2,70.36 90 top
U$188  [GND-04]  36.58,70.36 90 top
U$189  [3V3-04]  39.12,70.36 90 top
U$190  [INT#-[<]  49.28,70.23 90 top
U$191  [BUZZER0]  38.48,91.19 0 bottom
U$192  [ANT10]  51.82,70.36 90 top
U$193  [ANT20]  54.36,70.36 90 top
U$194  [READ0]  57.91,91.31 0 bottom
U$195  [QWIIC_RFID0]  37.46,95.76 0 top
U$196  [ANT20]  54.36,70.36 90 bottom
U$197  [ANT10]  51.82,70.36 90 bottom
U$198  [INT#-[<]  49.28,70.23 90 bottom
U$199  [SCL-[)]  44.2,70.36 90 bottom
U$200  [SDA-[)]  41.66,70.36 90 bottom
U$201  [3V3-04]  39.12,70.36 90 bottom
U$202  [GND-04]  36.58,70.36 90 bottom
U$203  [RST#-[>]  46.74,70.23 90 bottom
U$204  [I_SUPER2_C-()-03]  46.86,78.74 0 bottom
U$205  [ADR0]  37.08,87.5 0 bottom
U$206  [INT0]  50.93,75.56 90 bottom
U$207  [PWR-()-03]  33.66,90.93 0 top
U$208  [SPARKX-TINY]  40.39,98.04 0 bottom
U$209  [QWIIC-LOGO-MEDIUM]  71.37,83.95 0 bottom
U$210  SPARKX-LOGO3  [SPARKX-SMALL]  80.26,87.88 0 top
U$211  [RST#-[>]  72.64,70.23 90 top
U$212  [SDA-[)]  67.56,70.36 90 top
U$213  [SCL-[)]  70.1,70.36 90 top
U$214  [GND-04]  62.48,70.36 90 top
U$215  [3V3-04]  65.02,70.36 90 top
U$216  [INT#-[<]  75.18,70.23 90 top
U$217  [BUZZER0]  64.39,91.19 0 bottom
U$218  [ANT10]  77.72,70.36 90 top
U$219  [ANT20]  80.26,70.36 90 top
U$220  [READ0]  83.82,91.31 0 bottom
U$221  [QWIIC_RFID0]  63.37,95.76 0 top
U$222  [ANT20]  80.26,70.36 90 bottom
U$223  [ANT10]  77.72,70.36 90 bottom
U$224  [INT#-[<]  75.18,70.23 90 bottom
U$225  [SCL-[)]  70.1,70.36 90 bottom
U$226  [SDA-[)]  67.56,70.36 90 bottom
U$227  [3V3-04]  65.02,70.36 90 bottom
U$228  [GND-04]  62.48,70.36 90 bottom
U$229  [RST#-[>]  72.64,70.23 90 bottom
U$230  [I_SUPER2_C-()-03]  72.77,78.74 0 bottom
U$231  [ADR0]  62.99,87.5 0 bottom
U$232  [INT0]  76.84,75.56 90 bottom
U$233  [PWR-()-03]  59.56,90.93 0 top
U$234  [SPARKX-TINY]  66.29,98.04 0 bottom

## Library data of the parts
C1-C9 = SparkFun-Capacitors; PROD_ID: CAP-00810
D1 D3 D5 D7 D9 D11 D13 D15 D17 = SparkFun-LED; PROD_ID: DIO-00819
D2 D4 D6 D8 D10 D12 D14 D16 D18 = SparkFun-LED; PROD_ID: DIO-08575
E$1-E$4 LOGO1-LOGO9 = SparkFun-Aesthetics
E$5 E$6 = SparkFun-Retired
I2C I2C1-I2C8 JP7-JP9 JP16-JP18 JP25-JP27 JP34-JP36 JP43-JP45 JP52-JP54 JP61-JP63 JP70-JP72 JP79-JP81 = SparkFun-Jumpers
J1 J5-J8 J12-J16 J20-J24 J28-J32 J36-J40 J44-J48 J52-J56 J60-J64 J68-J72 = SparkFun-Connectors
J2-J4 J9-J11 J17-J19 J25-J27 J33-J35 J41-J43 J49-J51 J57-J59 J65-J67 U$1 U$4 U$28 U$52 U$54 U$78 U$80 U$104 U$106 U$130 U$132 U$156 U$158 U$182 U$184 U$208 U$210 U$234 = SparkX
JP1-JP6 JP10-JP15 JP19-JP24 JP28-JP33 JP37-JP42 JP46-JP51 JP55-JP60 JP64-JP69 JP73-JP78 = SparkFun
LS1-LS9 = SparkFun-Electromechanical; PROD_ID: COMP-08568
Q1-Q9 = SparkFun-DiscreteSemi; PROD_ID: TRANS-08049
R1 R2 R10 R12 R17 R19 R24 R26 R31 R33 R38 R40 R45 R47 R52 R54 R59 R61 = SparkFun-Resistors; PROD_ID: RES-00824
R3 R7 R8 R11 R13 R14 R18 R20 R21 R25 R27 R28 R32 R34 R35 R39 R41 R42 R46 R48 R49 R53 R55 R56 R60 R62 R63 = SparkFun-Resistors; PROD_ID: RES-07856
R4-R6 R9 R15 R16 R22 R23 R29 R30 R36 R37 R43 R44 R50 R51 R57 R58 = SparkFun-Resistors; PROD_ID: RES-08272
U1 U3 U5 U7 U9 U11 U13 U15 U17 = SparkFun-IC-Microcontroller; PROD_ID: IC-11285
U2 U4 U6 U8 U10 U12 U14 U16 U18 = SparkFun-RF; PROD_ID: CONN-09345, CONN-09344
U$2 U$5-U$11 U$14 U$21-U$27 U$29-U$34 U$42-U$48 U$51 U$53 U$55-U$60 U$68-U$74 U$77 U$79 U$81-U$86 U$94-U$100 U$103 U$105 U$107-U$112 U$120-U$126 U$129 U$131 U$133-U$138 U$146-U$152 U$155 U$157 U$159-U$164 U$172-U$178 U$181 U$183 U$185-U$190 U$198-U$204 U$207 U$209 U$211-U$216 U$224-U$230 U$233 = Labels
U$3 U$17 U$37 U$40 U$63 U$66 U$89 U$92 U$115 U$118 U$141 U$144 U$167 U$170 U$193 U$196 U$219 U$222 = ANT2
U$12 U$49 U$75 U$101 U$127 U$153 U$179 U$205 U$231 = ADR3
U$13 U$50 U$76 U$102 U$128 U$154 U$180 U$206 U$232 = INT3
U$15 U$35 U$61 U$87 U$113 U$139 U$165 U$191 U$217 = BUZZER
U$16 U$20 U$36 U$41 U$62 U$67 U$88 U$93 U$114 U$119 U$140 U$145 U$166 U$171 U$192 U$197 U$218 U$223 = ANT1
U$18 U$38 U$64 U$90 U$116 U$142 U$168 U$194 U$220 = READ
U$19 U$39 U$65 U$91 U$117 U$143 U$169 U$195 U$221 = QWIIC_RFID

## Nets
3.3V: C1.1 D2.A I2C.2 J2.2 J3.2 J4.2 J8.2 LS1.+ R1.2 R2.2 R3.2 U1.1 U2.2 U2.11
3.3V1: C2.1 D4.A I2C1.2 J9.2 J10.2 J11.2 J15.2 LS2.+ R10.2 R11.2 R12.2 U3.1 U4.2 U4.11
3.3V2: C3.1 D6.A I2C2.2 J17.2 J18.2 J19.2 J23.2 LS3.+ R17.2 R18.2 R19.2 U5.1 U6.2 U6.11
3.3V3: C4.1 D8.A I2C3.2 J25.2 J26.2 J27.2 J31.2 LS4.+ R24.2 R25.2 R26.2 U7.1 U8.2 U8.11
3.3V4: C5.1 D10.A I2C4.2 J33.2 J34.2 J35.2 J39.2 LS5.+ R31.2 R32.2 R33.2 U9.1 U10.2 U10.11
3.3V5: C6.1 D12.A I2C5.2 J41.2 J42.2 J43.2 J47.2 LS6.+ R38.2 R39.2 R40.2 U11.1 U12.2 U12.11
3.3V6: C7.1 D14.A I2C6.2 J49.2 J50.2 J51.2 J55.2 LS7.+ R45.2 R46.2 R47.2 U13.1 U14.2 U14.11
3.3V7: C8.1 D16.A I2C7.2 J57.2 J58.2 J59.2 J63.2 LS8.+ R52.2 R53.2 R54.2 U15.1 U16.2 U16.11
3.3V8: C9.1 D18.A I2C8.2 J65.2 J66.2 J67.2 J71.2 LS9.+ R59.2 R60.2 R61.2 U17.1 U18.2 U18.11
!INT: J5.1 JP8.1 U1.10
!INT1: J12.1 JP17.1 U3.10
!INT2: J20.1 JP26.1 U5.10
!INT3: J28.1 JP35.1 U7.10
!INT4: J36.1 JP44.1 U9.10
!INT5: J44.1 JP53.1 U11.10
!INT6: J52.1 JP62.1 U13.10
!INT7: J60.1 JP71.1 U15.10
!INT8: J68.1 JP80.1 U17.10
!RST: J7.1 J8.5 R2.1 U1.4
!RST1: J15.5 J16.1 R12.1 U3.4
!RST2: J23.5 J24.1 R19.1 U5.4
!RST3: J31.5 J32.1 R26.1 U7.4
!RST4: J39.5 J40.1 R33.1 U9.4
!RST5: J47.5 J48.1 R40.1 U11.4
!RST6: J55.5 J56.1 R47.1 U13.4
!RST7: J63.5 J64.1 R54.1 U15.4
!RST8: J71.5 J72.1 R61.1 U17.4
ANT1: J1.1 U2.3
ANT2: J6.1 U2.4
ANT3: J13.1 U4.3
ANT4: J14.1 U4.4
ANT5: J21.1 U6.3
ANT6: J22.1 U6.4
ANT7: J29.1 U8.3
ANT8: J30.1 U8.4
ANT9: J37.1 U10.3
ANT10: J38.1 U10.4
ANT11: J45.1 U12.3
ANT12: J46.1 U12.4
ANT13: J53.1 U14.3
ANT14: J54.1 U14.4
ANT15: J61.1 U16.3
ANT16: J62.1 U16.4
ANT17: J69.1 U18.3
ANT18: J70.1 U18.4
DATA_UART: U1.11 U2.9
DATA_UART1: U3.11 U4.9
DATA_UART2: U5.11 U6.9
DATA_UART3: U7.11 U8.9
DATA_UART4: U9.11 U10.9
DATA_UART5: U11.11 U12.9
DATA_UART6: U13.11 U14.9
DATA_UART7: U15.11 U16.9
DATA_UART8: U17.11 U18.9
GND: C1.2 D1.C J2.1 J3.1 J4.1 J8.6 JP7.1 Q1.2 U1.14 U2.1 U2.7
GND1: C2.2 D3.C J9.1 J10.1 J11.1 J15.6 JP16.1 Q2.2 U3.14 U4.1 U4.7
GND2: C3.2 D5.C J17.1 J18.1 J19.1 J23.6 JP25.1 Q3.2 U5.14 U6.1 U6.7
GND3: C4.2 D7.C J25.1 J26.1 J27.1 J31.6 JP34.1 Q4.2 U7.14 U8.1 U8.7
GND4: C5.2 D9.C J33.1 J34.1 J35.1 J39.6 JP43.1 Q5.2 U9.14 U10.1 U10.7
GND5: C6.2 D11.C J41.1 J42.1 J43.1 J47.6 JP52.1 Q6.2 U11.14 U12.1 U12.7
GND6: C7.2 D13.C J49.1 J50.1 J51.1 J55.6 JP61.1 Q7.2 U13.14 U14.1 U14.7
GND7: C8.2 D15.C J57.1 J58.1 J59.1 J63.6 JP70.1 Q8.2 U15.14 U16.1 U16.7
GND8: C9.2 D17.C J65.1 J66.1 J67.1 J71.6 JP79.1 Q9.2 U17.14 U18.1 U18.7
LED_BUZZ: R7.2 U2.10
LED_BUZZ1: R13.2 U4.10
LED_BUZZ2: R20.2 U6.10
LED_BUZZ3: R27.2 U8.10
LED_BUZZ4: R34.2 U10.10
LED_BUZZ5: R41.2 U12.10
LED_BUZZ6: R48.2 U14.10
LED_BUZZ7: R55.2 U16.10
LED_BUZZ8: R62.2 U18.10
MISO: J8.1 U1.8
MISO1: J15.1 U3.8
MISO2: J23.1 U5.8
MISO3: J31.1 U7.8
MISO4: J39.1 U9.8
MISO5: J47.1 U11.8
MISO6: J55.1 U13.8
MISO7: J63.1 U15.8
MISO8: J71.1 U17.8
N$1: I2C.1 R5.2
N$2: I2C.3 R4.2
N$3: D1.A R3.1
N$4: JP8.2 R1.1
N$5: D2.C R8.2
N$6: JP7.2 U1.13
N$7: Q1.1 R7.1
N$8: JP9.1 Q1.3 R8.1
N$9: JP9.2 LS1.-
N$10: I2C1.1 R9.2
N$11: D3.A R11.1
N$12: JP16.2 U3.13
N$13: I2C1.3 R6.2
N$14: JP17.2 R10.1
N$15: Q2.1 R13.1
N$16: JP18.1 Q2.3 R14.1
N$17: D4.C R14.2
N$18: JP18.2 LS2.-
N$19: I2C2.1 R16.2
N$20: D5.A R18.1
N$21: JP25.2 U5.13
N$22: I2C2.3 R15.2
N$23: JP26.2 R17.1
N$24: Q3.1 R20.1
N$25: JP27.1 Q3.3 R21.1
N$26: D6.C R21.2
N$27: JP27.2 LS3.-
N$28: I2C3.1 R23.2
N$29: D7.A R25.1
N$30: JP34.2 U7.13
N$31: I2C3.3 R22.2
N$32: JP35.2 R24.1
N$33: Q4.1 R27.1
N$34: JP36.1 Q4.3 R28.1
N$35: D8.C R28.2
N$36: JP36.2 LS4.-
N$37: I2C4.1 R30.2
N$38: D9.A R32.1
N$39: JP43.2 U9.13
N$40: I2C4.3 R29.2
N$41: JP44.2 R31.1
N$42: Q5.1 R34.1
N$43: JP45.1 Q5.3 R35.1
N$44: D10.C R35.2
N$45: JP45.2 LS5.-
N$46: I2C5.1 R37.2
N$47: D11.A R39.1
N$48: JP52.2 U11.13
N$49: I2C5.3 R36.2
N$50: JP53.2 R38.1
N$51: Q6.1 R41.1
N$52: JP54.1 Q6.3 R42.1
N$53: D12.C R42.2
N$54: JP54.2 LS6.-
N$55: I2C6.1 R44.2
N$56: D13.A R46.1
N$57: JP61.2 U13.13
N$58: I2C6.3 R43.2
N$59: JP62.2 R45.1
N$60: Q7.1 R48.1
N$61: JP63.1 Q7.3 R49.1
N$62: D14.C R49.2
N$63: JP63.2 LS7.-
N$64: I2C7.1 R51.2
N$65: D15.A R53.1
N$66: JP70.2 U15.13
N$67: I2C7.3 R50.2
N$68: JP71.2 R52.1
N$69: Q8.1 R55.1
N$70: JP72.1 Q8.3 R56.1
N$71: D16.C R56.2
N$72: JP72.2 LS8.-
N$73: I2C8.1 R58.2
N$74: D17.A R60.1
N$75: JP79.2 U17.13
N$76: I2C8.3 R57.2
N$77: JP80.2 R59.1
N$78: Q9.1 R62.1
N$79: JP81.1 Q9.3 R63.1
N$80: D18.C R63.2
N$81: JP81.2 LS9.-
SCL/SCK: J2.4 J3.4 J4.4 J8.3 R5.1 U1.9
SCL/SCK1: J9.4 J10.4 J11.4 J15.3 R9.1 U3.9
SCL/SCK2: J17.4 J18.4 J19.4 J23.3 R16.1 U5.9
SCL/SCK3: J25.4 J26.4 J27.4 J31.3 R23.1 U7.9
SCL/SCK4: J33.4 J34.4 J35.4 J39.3 R30.1 U9.9
SCL/SCK5: J41.4 J42.4 J43.4 J47.3 R37.1 U11.9
SCL/SCK6: J49.4 J50.4 J51.4 J55.3 R44.1 U13.9
SCL/SCK7: J57.4 J58.4 J59.4 J63.3 R51.1 U15.9
SCL/SCK8: J65.4 J66.4 J67.4 J71.3 R58.1 U17.9
SDA/MOSI: J2.3 J3.3 J4.3 J8.4 R4.1 U1.7
SDA/MOSI1: J9.3 J10.3 J11.3 J15.4 R6.1 U3.7
SDA/MOSI2: J17.3 J18.3 J19.3 J23.4 R15.1 U5.7
SDA/MOSI3: J25.3 J26.3 J27.3 J31.4 R22.1 U7.7
SDA/MOSI4: J33.3 J34.3 J35.3 J39.4 R29.1 U9.7
SDA/MOSI5: J41.3 J42.3 J43.3 J47.4 R36.1 U11.7
SDA/MOSI6: J49.3 J50.3 J51.3 J55.4 R43.1 U13.7
SDA/MOSI7: J57.3 J58.3 J59.3 J63.4 R50.1 U15.7
SDA/MOSI8: J65.3 J66.3 J67.3 J71.4 R57.1 U17.7
TAG_IN_RANGE: U1.5 U2.6
TAG_IN_RANGE1: U3.5 U4.6
TAG_IN_RANGE2: U5.5 U6.6
TAG_IN_RANGE3: U7.5 U8.6
TAG_IN_RANGE4: U9.5 U10.6
TAG_IN_RANGE5: U11.5 U12.6
TAG_IN_RANGE6: U13.5 U14.6
TAG_IN_RANGE7: U15.5 U16.6
TAG_IN_RANGE8: U17.5 U18.6